# Altium PCB VG扩展板.PcbDoc
Units mil, origin at the board's own origin, x right, y up, seen from the top; angles counter-clockwise.
Board outline 6000 x 4000 mil, 2 copper layers (Top Layer, Bottom Layer); 45 components, 75 nets, 306 pads, 0 vias.
Unrouted connection lines stored in the file: 157.
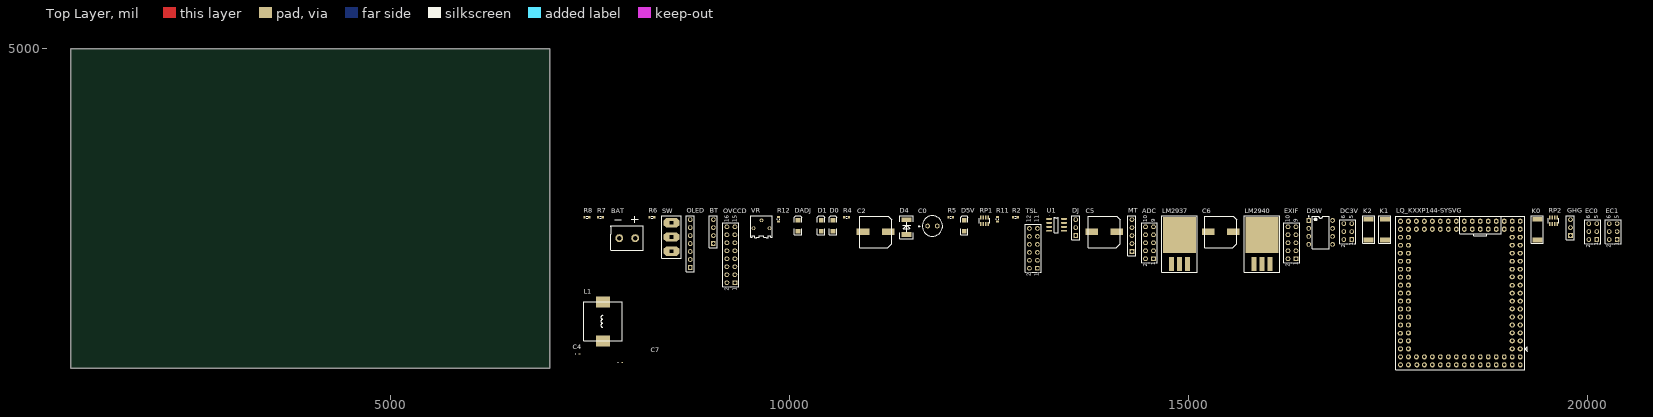
[diagram p0: Top Layer view]
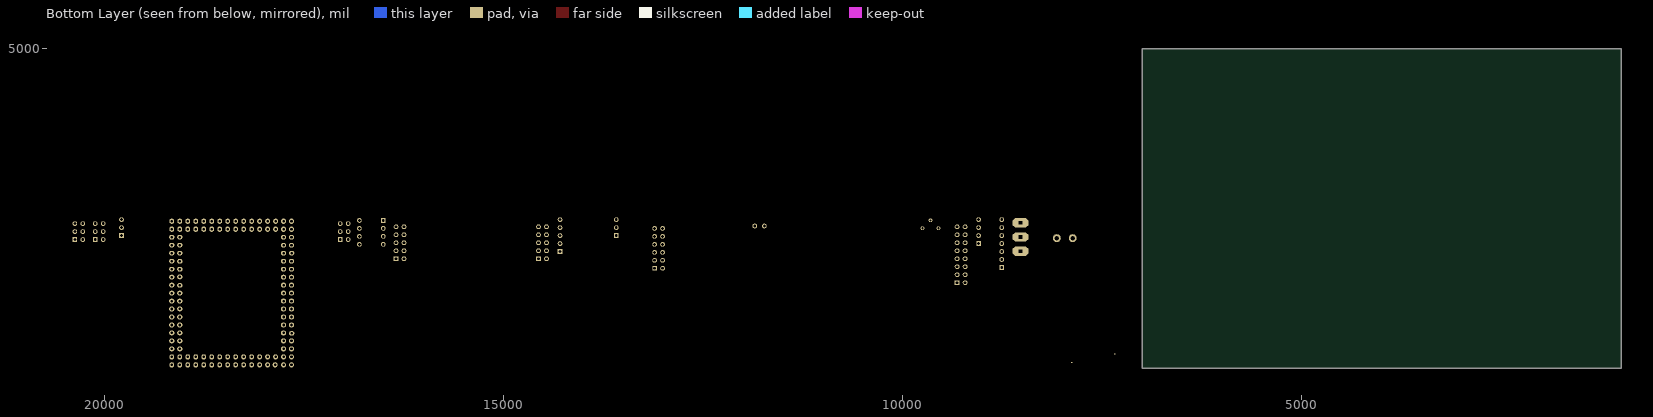
[diagram p1: Bottom Layer view, seen from below]

## Layer stack, top to bottom
Top Solder: solder mask 0.4, Solder Resist, Dk 3.5
Top Layer: signal copper 1.4
Dielectric 1: dielectric 12.6, FR-4, Dk 4.8
Bottom Layer: signal copper 1.4
Bottom Solder: solder mask 0.4, Solder Resist, Dk 3.5

## Board outline
1000,1000 7000,1000 7000,5000 1000,5000

## Design rules (kind name [scope] priority, off if disabled: settings)
Clearance [All] p1: gap=10 ignorepadtopadclearanceinfootprint=FALSE except(0: Arc-Hole Track-Hole SMDPad-Hole THPad-Hole Via-Hole Fill-Hole Poly-Hole Region-Hole Text-Hole)
PolygonConnect [All] p1: connectstyle=Relief reliefconductorwidth=10 reliefentries=4 polygonreliefangle="90 Angle" airgapwidth=10
RoutingVias [All] p1: holewidth=28 width=50 viastyle="Through Hole" minholewidth=28 minwidth=50 maxholewidth=28 maxwidth=50
SolderMaskExpansion [All] p1: expansion=4
Width [All] p1: maxlimit=10 minlimit=10 preferedwidth=10
30 further rules are at their usual default settings.

## Components (designator, comment, footprint, x,y, rotation, side; value= is the part's Value field where it differs from the comment)
ADC "AD/电磁传感器接口电路" HDR2X5 14566.22,2370 r90 top
BAT "Header 2" power1 7976.22,2630 r0 top
BT "蓝牙接口" HDR1X4 9051.22,2560 r90 top
C0 "" "rb -5" 11796.22,2780 r0 top value=220U
C2 "" 3527 11111.22,2700 r0 top value=470u
C4 "104" 0603 7360,1175 r0 top value=100nF
C5 "" 3527 13976.22,2700 r0 top value=470u
C6 "" 3527 15436.22,2700 r0 top value=470u
C7 "104" 0603 7896.22,1070 r0 top value=100nF
D0 "" 3.2X1.6X1.1 10551.22,2785 r90 top
D1 "" 3.2X1.6X1.1 10401.22,2785 r90 top
D4 "1N5824" 1812_DIODE 11471.22,2765 r90 top
D5V "" 3.2X1.6X1.1 12196.22,2785 r90 top
DADJ "" 3.2X1.6X1.1 10111.22,2785 r90 top
DC3V "3.3V扩展电路" HDR2X3 17051.22,2610 r90 top
DJ "DJ" HDR1X3 13591.22,2660 r90 top
DSW "4位薄码开关电路" DIP-8 16661.22,2700 r0 top
EC0 "" HDR2X3 20121.22,2610 r90 top
EC1 "Header 3X2" HDR2X3 20376.22,2610 r90 top
EXIF "GPIO扩展电路" HDR2X5 16351.22,2370 r90 top
GHG "" HDR1X3 19791.22,2660 r90 top
K0 "" 2512R 19376.22,2735 r90 top
K1 "" 2512R 17466.22,2735 r90 top
K2 "" 2512R 17261.22,2735 r90 top
L1 "" CL1010 7666.22,1585 r90 top value=33uH
LM2937 "3.3V稳压电路" TO263-3 14891.22,2485 r0 top
LM2940 "5V稳压电路" TO263-3 15926.22,2485 r0 top
LQ_KXXP144-SYSVG "LQ_KXXP144-SYSVG" LQ_KXXP144-SYSVG 19161.22,1240 r90 top
MT "双马达驱动" HDR1X5 14296.22,2460 r90 top
OLED "OLED接口" HDR1X7 8761.22,2260 r90 top
OVCCD "OV7620摄像头接口" HDR2X8 9321.22,2070 r90 top
R2 "" J1-0603 12836.22,2890 r0 top value=1K
R4 "" J1-0603 10721.22,2890 r0 top value=2K
R5 "" J1-0603 12026.22,2890 r0 top value=3.3K
R6 "" J1-0603 8281.22,2890 r0 top value=2K
R7 "" J1-0603 7636.22,2890 r0 top value=1K
R8 "" J1-0603 7466.22,2890 r0 top value=2K
R11 "" J1-0603 12611.22,2865 r90 top value=2K
R12 "" J1-0603 9866.22,2865 r90 top value=750R
RP1 "1K" RESPACK4_SMD 12401.22,2805 r0 top
RP2 "1K" RESPACK4_SMD 19531.22,2805 r0 top
SW "" "钮子开关 - duplicate" 8526.22,2820 r0 top
TSL "线阵CCD TSL1401接口" HDR2X6 13111.22,2250 r90 top
U1 "AS1015" SOP8L 13351.22,2795 r0 top
VR "" 3362 9521.22,2910 r0 top value=2K

## Footprints (in the part's own frame and the unit in brackets; to place one, negate y for a bottom-side part, rotate by r counter-clockwise, add the part's x,y. Pads: shape width x height; smd on the part's side, far side on the other; paste and mask are expansions set on the pad)
3.2X1.6X1.1 [mm] "SMT LED; 2 Flat Leads"
  rect 1.5x1.5 smd: 1(-1.75,0) 2(1.75,0)
  silkscreen extent -2.9,-1.15 3.2,1.15
0603 [mm]
  rect 0.5x0.3 smd far side: 1(-0.35,0)
  rect 0.5x0.3 smd: 2(0.35,0)
  silkscreen extent -0.9,-0.05 -0.9,0.05, body extent -0.33,-0.18 0.33,0.18, height 0.55
1812_DIODE [mil]
  rect 60x125 smd: 1(-92.5,0) 2(92.5,0)
  silkscreen extent -142,-85 142,85
2512R [mm]
  rect 1.52x3.2 smd: 1(-3.3,0) 2(3.3,0)
  silkscreen extent -4.4,-1.9 4.4,1.9
3362 [mm]
  round 1.2 hole 0.7: 1(0.85,-4) 2(5.95,-4) 3(3.4,-1.5)
  silkscreen extent 0,-7.1 6.8,0
3527 [mil]
  rect 160x80 smd: 1(130,10) 2(-185,10)
  silkscreen extent -225,-190 175,205
CL1010 [mil]
  rect 137.8x177.17 smd: 1(-243,-2) 2(243,-2)
  silkscreen extent -242,-242 243,242
DIP-8 [mm] "DIP; 8 Leads; Row Spacing 7.62 mm; Pitch 2.54 mm"
  rect 1.5x1.5 hole 0.9: 1(-3.81,3.81)
  round 1.5 hole 0.9: 2(-3.81,1.27) 3(-3.81,-1.27) 4(-3.81,-3.81) 5(3.81,-3.81) 6(3.81,-1.27) 7(3.81,1.27) 8(3.81,3.81)
  silkscreen extent -3.93,-5.15 2.65,5.23, body extent -3.6,-5.15 3.6,5.15, height 5.08
HDR1X3 [mm] "Connector; Header; 3 Position"
  rect 1.5x1.5 hole 0.9: 1(0,0)
  round 1.5 hole 0.9: 2(2.54,0) 3(5.08,0)
  silkscreen extent -1.27,-1.27 6.35,1.27
HDR1X4 [mm] "Connector; Header; 4 Position"
  rect 1.5x1.5 hole 0.9: 1(0,0)
  round 1.5 hole 0.9: 2(2.54,0) 3(5.08,0) 4(7.62,0)
  silkscreen extent -1.27,-1.27 8.89,1.27
HDR1X5 [mm] "Connector; Header; 5 Position"
  rect 1.5x1.5 hole 0.9: 1(0,0)
  round 1.5 hole 0.9: 2(2.54,0) 3(5.08,0) 4(7.62,0) 5(10.16,0)
  silkscreen extent -1.27,-1.27 11.43,1.27
HDR1X7 [mm] "Connector; Header; 7 Position"
  rect 1.5x1.5 hole 0.9: 1(0,0)
  round 1.5 hole 0.9: 2(2.54,0) 3(5.08,0) 4(7.62,0) 5(10.16,0) 6(12.7,0) 7(15.24,0)
  silkscreen extent -1.27,-1.27 16.51,1.27
HDR2X3 [mm] "Connector; Header; 3x2 Position"
  rect 1.5x1.5 hole 0.9: 1(0,0)
  round 1.5 hole 0.9: 2(0,2.54) 3(2.54,0) 4(2.54,2.54) 5(5.08,0) 6(5.08,2.54)
  silkscreen extent -1.27,-1.27 6.35,3.81
HDR2X5 [mm] "Connector; Header; 5x2 Position"
  rect 1.5x1.5 hole 0.9: 1(0,0)
  round 1.5 hole 0.9: 2(0,2.54) 3(2.54,0) 4(2.54,2.54) 5(5.08,0) 6(5.08,2.54) 7(7.62,0) 8(7.62,2.54) 9(10.16,0) 10(10.16,2.54)
  silkscreen extent -1.27,-1.27 11.43,3.81
HDR2X6 [mm] "Connector; Header; 6x2 Position"
  rect 1.5x1.5 hole 0.9: 1(0,0)
  round 1.5 hole 0.9: 2(0,2.54) 3(2.54,0) 4(2.54,2.54) 5(5.08,0) 6(5.08,2.54) 7(7.62,0) 8(7.62,2.54) 9(10.16,0) 10(10.16,2.54) 11(12.7,0) 12(12.7,2.54)
  silkscreen extent -1.27,-1.27 13.97,3.81
HDR2X8 [mm] "Connector; Header; 8x2 Position"
  rect 1.5x1.5 hole 0.9: 1(0,0)
  round 1.5 hole 0.9: 2(0,2.54) 3(2.54,0) 4(2.54,2.54) 5(5.08,0) 6(5.08,2.54) 7(7.62,0) 8(7.62,2.54) 9(10.16,0) 10(10.16,2.54) 11(12.7,0) 12(12.7,2.54) 13(15.24,0) 14(15.24,2.54) 15(17.78,0) 16(17.78,2.54)
  silkscreen extent -1.27,-1.27 19.05,3.81
J1-0603 [mm] "Chip Resistor, Body 1.6x0.8mm, IPC High Density"
  rect 0.7x0.9 smd: 1(-0.75,0) 2(0.75,0)
  silkscreen extent -0.2,-0.35 0.2,0.35, body extent -0.85,-0.48 0.85,0.48, height 0.9
LQ_KXXP144-SYSVG [mil]
  oval 59x66 hole 32: 1(0,0) 2(0,100) 3(100,0) 4(100,100) 5(200,0) 6(200,100) 7(300,0) 8(300,100) 9(400,0) 10(400,100) 11(500,0) 12(500.79,100) 13(600,0) 14(600,100) 15(700,0) 16(700,100) 17(800,0) 18(796.85,100) 19(900,0) 20(902.36,100) 21(1000,0) 22(998.82,100) 23(1100,0) 24(1097.64,100) 25(1200,0) 26(1200.39,100) 27(1300,0) 28(1300,100) 29(1400,0) 30(1400.39,100) 63(1400,1500) 64(1400,1400) 65(1300,1500) 66(1300,1400) 67(1200,1501.97) 68(1200,1400) 69(1100,1500) 70(1100,1400) 71(1000,1500) 72(1000,1400) 73(900,1500) 74(900,1400) 75(800,1500) 76(800,1400) 77(700,1500) 78(700,1400) 79(600,1500) 80(600,1400) 81(500,1500) 82(500,1400) 83(400,1500) 84(400,1400) 85(300,1500) 86(300,1400) 87(194.88,1502.36) 88(200,1400) 89(100,1500) 90(100,1400) 91(0,1500) 92(0,1400)
  oval 66x59 hole 32: 31(1500,0) 32(1600,0) 33(1500,100) 34(1600,100) 35(1500,200) 36(1600,200) 37(1500,300) 38(1600,300) 39(1500,400.79) 40(1600,400) 41(1500,500) 42(1600,500.39) 43(1500,600) 44(1600,600) 45(1500,700) 46(1600,700) 47(1500,800) 48(1600,800) 49(1500,900) 50(1600,900) 51(1500,1000) 52(1600,1000) 53(1500,1100) 54(1600,1100) 55(1500,1200) 56(1600,1200) 57(1500,1300) 58(1600,1300) 59(1500,1400) 60(1600,1400) 61(1500,1500) 62(1600,1500) 93(-100,1500) 94(-200,1500) 95(-100,1400) 96(-200,1400) 97(-100,1300) 98(-200,1294.09) 99(-100,1200) 100(-200,1200) 101(-100,1100) 102(-200,1100) 103(-100,1000) 104(-200,1000) 105(-100,899.61) 106(-200,900.39) 107(-100,800) 108(-200,800) 109(-100,700) 110(-200,700) 111(-100,600) 112(-200,600) 113(-100,500) 114(-200,500) 115(-100,400) 116(-200,400) 117(-100,300) 118(-200,300) 119(-100,200) 120(-200,200) 121(-100,100) 122(-200,100) 123(-100,0) 124(-200,0)
  silkscreen extent -260,-87 1660,1560
power1 [mm]
  round 2.5 hole 1.5: 1(-2.642,-0.051) 2(2.413,-0.051)
  silkscreen extent -5.38,-3.96 5.05,6.98
"rb -5" [mm]
  round 1.5 hole 0.9: 1(-1.524,0) 2(1.524,0)
  silkscreen extent -4.57,-3.25 3.25,3.25
RESPACK4_SMD [mm]
  rect 0.4x1.174 smd: 1(0,0) 2(0,2.074) 3(0.8,0) 4(0.8,2.074) 5(1.6,0) 6(1.6,2.074) 7(2.4,0) 8(2.4,2.074)
  silkscreen extent -0.45,0.21 2.85,1.86
SOP8L [mm]
  oval 1.9x0.6 smd: 1(-2.35,1.905) 2(-2.35,0.635) 3(-2.35,-0.635) 4(-2.35,-1.905) 5(2.35,-1.905) 6(2.35,-0.635) 7(2.35,0.635) 8(2.35,1.905)
  silkscreen extent -2.38,-2.57 0.62,2.91, body extent -2.99,-2.49 3.05,2.53, height 1.7
TO263-3 [mm]
  rect 1.5x4.5 smd: 1(-2.54,-4.648) 2(0,-4.648) 3(2.54,-4.648)
  rect 10.5x11.5 smd: 4(0,4.648)
  silkscreen extent -5.6,-7.25 5.6,10.75
"钮子开关 - duplicate" [mm]
  oct 5x3 hole 1 square: 1(0,0) 2(0,-4.5) 3(0,-9)
  silkscreen extent -3.17,-11.25 3.17,2.25

## Part data
ADC EXIF: library part "Header 5X2", "Header, 5-Pin, Dual row", LatestRevisionDate=17-Jul-2002, LatestRevisionNote="Re-released for DXP Platform.", Publisher="Altium Limited"
BAT: "Header, 2-Pin", LatestRevisionDate=17-Jul-2002, LatestRevisionNote="Re-released for DXP Platform.", Publisher="Altium Limited"
BT: library part "Header 4", "Header, 4-Pin", LatestRevisionDate=17-Jul-2002, LatestRevisionNote="Re-released for DXP Platform.", Publisher="Altium Limited"
C0: library part "Cap Pol1", "Polarized Capacitor (Radial)", LatestRevisionDate=17-Jul-2002, LatestRevisionNote="Re-released for DXP Platform.", PackageDescription="Polarized Capacitor (Radial); 2 Leads", PackageReference=RB7.6-15, Published=8-Jun-2000, Publisher="Altium Limited"
C2 C5 C6: library part "Cap Pol3", "Polarized Capacitor (Surface Mount)", LatestRevisionDate=29-May-2009, LatestRevisionNote="IPC-7351 Footprint Added.", PackageDescription="Chip Capacitor", PackageReference=C0805, Published=8-Jun-2000, Publisher="Altium Limited"
C4 C7: library part "Cap Semi", "Capacitor (Semiconductor SIM Model)", LatestRevisionDate=29-May-2009, LatestRevisionNote="IPC-7351 Footprint Added.", PackageDescription="Chip Capacitor", PackageReference=C1206, Published=8-Jun-2000, Publisher="Altium Limited"
D0 D1 D5V DADJ: library part LED3, "Typical BLUE SiC LED", DatasheetVersion=16-Apr-2002, LatestRevisionDate=17-Dec-2003, LatestRevisionNote="PCB Footprint replaced.", PackageDescription="SM LED; 2 C-Bend Leads; Body 3.5 x 2.8 x 1.9 mm, inc leads (LxWxH typ)", PackageReference=3.5X2.8X1.9, PackageVersion=16-Apr-2002, Published=8-Jun-2000, Publisher="Altium Limited"
D4: library part Diode, "Default Diode", Code_JEDEC=DO-214-AB, LatestRevisionDate=17-Jul-2002, LatestRevisionNote="Re-released for DXP Platform.", PackageDescription="DO-214-AB/SMC; 2 C-Bend Leads; Body 7.9 x 5.9 mm, inc. leads (LxW)", PackageReference=SMC, PackageVersion=Sep-1996, Published=8-Jun-2000, Publisher="Altium Limited"
DC3V: library part "Header 3X2H", "Header, 3-Pin, Dual row, Right Angle", LatestRevisionDate=17-Jul-2002, LatestRevisionNote="Re-released for DXP Platform.", Publisher="Altium Limited"
DJ GHG: library part "Header 3", "Header, 3-Pin", LatestRevisionDate=17-Jul-2002, LatestRevisionNote="Re-released for DXP Platform.", Publisher="Altium Limited"
DSW: library part SW-DIP4, "DIP Switch", LatestRevisionDate=17-Jul-2002, LatestRevisionNote="Re-released for DXP Platform.", PackageReference=DIP-8, Published=24-Mar-1999, Publisher="Altium Limited"
EC0: library part "Header 3X2", "Header, 3-Pin, Dual row", LatestRevisionDate=17-Jul-2002, LatestRevisionNote="Re-released for DXP Platform.", Publisher="Altium Limited"
EC1: "Header, 3-Pin, Dual row", LatestRevisionDate=17-Jul-2002, LatestRevisionNote="Re-released for DXP Platform.", Publisher="Altium Limited"
K0 K1 K2: library part SW-PB, "Switch", LatestRevisionDate=17-Jul-2002, LatestRevisionNote="Re-released for DXP Platform.", PackageDescription="Switch; 2 Leads", PackageReference=SPST-2, Published=24-Mar-1999, Publisher="Altium Limited"
L1: library part Inductor, "Inductor", Code_IEC=1005, Code_JEITA=0402, LatestRevisionDate=29-May-2009, LatestRevisionNote="IPC-7351 Footprint Added.", PackageDescription="Chip Inductor", PackageReference=0402-A, Published=8-Jun-2000, Publisher="Altium Limited"
LM2937 LM2940: library part LM2940, "固定5V输出直流稳压芯片"
MT: library part "Header 5", "Header, 5-Pin", LatestRevisionDate=17-Jul-2002, LatestRevisionNote="Re-released for DXP Platform.", Publisher="Altium Limited"
OLED: library part "Header 7", "Header, 7-Pin", LatestRevisionDate=17-Jul-2002, LatestRevisionNote="Re-released for DXP Platform.", Publisher="Altium Limited"
OVCCD: library part "Header 8X2", "Header, 8-Pin, Dual row", LatestRevisionDate=17-Jul-2002, LatestRevisionNote="Re-released for DXP Platform.", Publisher="Altium Limited"
R2 R4 R5 R6 R7 R8 R11 R12: library part Res3, "Resistor", LatestRevisionDate=29-May-2009, LatestRevisionNote="IPC-7351 Footprint Added.", PackageDescription="Chip Resistor", PackageReference=J1-0603, Published=8-Jun-2000, Publisher="Altium Limited"
RP1 RP2: library part RESPACK4
SW: library part 钮子开关
TSL: library part "Header 6X2", "Header, 6-Pin, Dual row", LatestRevisionDate=17-Jul-2002, LatestRevisionNote="Re-released for DXP Platform.", Publisher="Altium Limited"
VR: library part "Res Tap", "Tapped Resistor", LatestRevisionDate=17-Jul-2002, LatestRevisionNote="Re-released for DXP Platform.", PackageDescription="Variable Resistor, Thru-Hole; 3 Leads", PackageReference=VR3, Published=24-Mar-1999, Publisher="Altium Limited", Set Position=0.5, Sim Note="Enter the Resistance value and the set point into parameter fields."

## Nets (pads, with @x,y where several pads share a name; then routed paths per layer and width w, separated by ;. In a path a pad name is that pad's centre, name@x,y a point inside that pad or via, vN(x,y) a via of type N, cw(c..) or ccw(c..) an arc to the next point about the centre after c; other vN are vias at no path point)
3.3V: BT.1 C4.2 C5.1 D0.1 D1.1 DC3V.1 DC3V.3 DC3V.5 GHG.1 LM2937.3 LQ_KXXP144-SYSVG.45 MT.5 OLED.2 RP2.2 RP2.4 RP2.6 RP2.8
5V: ADC.9 C6.1 C7.2 D5V.1 EC0.2 EC1.2 EXIF.2 EXIF.4 LM2940.3 OVCCD.15 TSL.3 TSL.4
AD0: ADC.7 LQ_KXXP144-SYSVG.70
AD1: ADC.8 LQ_KXXP144-SYSVG.69
AD2: ADC.5 LQ_KXXP144-SYSVG.72
AD3: ADC.6 LQ_KXXP144-SYSVG.71
AD4: ADC.3 LQ_KXXP144-SYSVG.80
AD5: ADC.4 LQ_KXXP144-SYSVG.79
AD6: ADC.1 LQ_KXXP144-SYSVG.26 TSL.11
AD7: ADC.2 LQ_KXXP144-SYSVG.27 TSL.12
AD8: LQ_KXXP144-SYSVG.51 R8.2
AD9: LQ_KXXP144-SYSVG.20 TSL.5
AD10: LQ_KXXP144-SYSVG.18 TSL.6
BAT: C0.1 LM2937.1 LM2940.1 R4.1 R6.2 R11.2 SW.2 U1.4
CTL: R4.2 U1.2
GND: ADC.10 BAT.1 BT.2 C0.2 C2.2 C4.1 C5.2 C6.2 C7.1 D4.1 DADJ.2 DC3V.2 DC3V.4 DC3V.6 DJ.1 DSW.1 DSW.2 DSW.3 DSW.4 EC0.1 EC1.1 EXIF.1 EXIF.3 GHG.2 K0.1 K1.1 K2.1 LM2937.2 LM2940.2 LQ_KXXP144-SYSVG.41 LQ_KXXP144-SYSVG.43 OLED.1 OVCCD.13 OVCCD.16 R7.1 RP1.2 TSL.1 TSL.2 U1.7 U1.8 VR.2
HRF: LQ_KXXP144-SYSVG.96 OVCCD.12
NetC2_1: C2.1 DJ.2 L1.2 R2.2 R5.2
NetD0_2: D0.2 RP1.5
NetD1_2: D1.2 RP1.7
NetD4_2: D4.2 L1.1 U1.5 U1.6
NetD5V_2: D5V.2 RP1.1
NetDADJ_1: DADJ.1 R5.1
NetR2_1: R2.1 U1.1 VR.3
NetR6_1: R6.1 R7.2 R8.1
NetR11_1: R11.1 R12.2
NetR12_1: R12.1 U1.3
PCLK: LQ_KXXP144-SYSVG.62 OVCCD.11
PTA12: EC0.3 LQ_KXXP144-SYSVG.55
PTA13: EC0.4 LQ_KXXP144-SYSVG.56
PTA16: GHG.3 LQ_KXXP144-SYSVG.59
PTB16: EC1.3 LQ_KXXP144-SYSVG.82
PTB17: EC1.4 LQ_KXXP144-SYSVG.81
PTB19: DJ.3 LQ_KXXP144-SYSVG.83
PTB20: K0.2 LQ_KXXP144-SYSVG.86 RP2.1
PTB21: K1.2 LQ_KXXP144-SYSVG.85 RP2.3
PTB22: K2.2 LQ_KXXP144-SYSVG.88 RP2.7
PTC1: LQ_KXXP144-SYSVG.89 MT.4
PTC2: LQ_KXXP144-SYSVG.92 MT.3
PTC3: LQ_KXXP144-SYSVG.91 MT.2
PTC4: LQ_KXXP144-SYSVG.94 MT.1
PTC7: LQ_KXXP144-SYSVG.95 OVCCD.14
PTC8: DSW.8 LQ_KXXP144-SYSVG.98
PTC9: DSW.7 LQ_KXXP144-SYSVG.97
PTC10: DSW.6 LQ_KXXP144-SYSVG.100
PTC11: DSW.5 LQ_KXXP144-SYSVG.99
PTC13: LQ_KXXP144-SYSVG.101 OLED.6
PTC14: LQ_KXXP144-SYSVG.104 OLED.5
PTC15: LQ_KXXP144-SYSVG.103 OLED.4
PTC16: LQ_KXXP144-SYSVG.106 OLED.3
PTC18: LQ_KXXP144-SYSVG.108 RP1.6
PTC19: LQ_KXXP144-SYSVG.107 RP1.8
PTD0: LQ_KXXP144-SYSVG.110 OVCCD.1
PTD1: LQ_KXXP144-SYSVG.109 OVCCD.2
PTD2: LQ_KXXP144-SYSVG.112 OVCCD.3
PTD3: LQ_KXXP144-SYSVG.111 OVCCD.4
PTD4: LQ_KXXP144-SYSVG.114 OVCCD.5
PTD5: LQ_KXXP144-SYSVG.113 OVCCD.6
PTD6: LQ_KXXP144-SYSVG.116 OVCCD.7
PTD7: LQ_KXXP144-SYSVG.115 OVCCD.8
PTE0: LQ_KXXP144-SYSVG.1 OVCCD.9
PTE1: LQ_KXXP144-SYSVG.2 OVCCD.10
PTE2: LQ_KXXP144-SYSVG.3 TSL.8
PTE3: LQ_KXXP144-SYSVG.4 TSL.10
PTE4: LQ_KXXP144-SYSVG.5 TSL.7
PTE5: LQ_KXXP144-SYSVG.6 TSL.9
PTE7: EXIF.5 LQ_KXXP144-SYSVG.8
PTE8: EXIF.6 LQ_KXXP144-SYSVG.9
PTE9: EXIF.7 LQ_KXXP144-SYSVG.10
PTE10: EXIF.8 LQ_KXXP144-SYSVG.11
PTE11: EXIF.9 LQ_KXXP144-SYSVG.12
PTE12: EXIF.10 LQ_KXXP144-SYSVG.13
PTE24: BT.4 LQ_KXXP144-SYSVG.32
PTE25: BT.3 LQ_KXXP144-SYSVG.33
VCC12V: BAT.2 SW.1
pads on no net: EC0.5 EC0.6 EC1.5 EC1.6 LM2937.4 LM2940.4 LQ_KXXP144-SYSVG.7 LQ_KXXP144-SYSVG.14 LQ_KXXP144-SYSVG.15 LQ_KXXP144-SYSVG.16 LQ_KXXP144-SYSVG.17 LQ_KXXP144-SYSVG.19 LQ_KXXP144-SYSVG.21 LQ_KXXP144-SYSVG.22 LQ_KXXP144-SYSVG.23 LQ_KXXP144-SYSVG.24 LQ_KXXP144-SYSVG.25 LQ_KXXP144-SYSVG.28 LQ_KXXP144-SYSVG.29 LQ_KXXP144-SYSVG.30 LQ_KXXP144-SYSVG.31 LQ_KXXP144-SYSVG.34 LQ_KXXP144-SYSVG.35 LQ_KXXP144-SYSVG.36 LQ_KXXP144-SYSVG.37 LQ_KXXP144-SYSVG.38 LQ_KXXP144-SYSVG.39 LQ_KXXP144-SYSVG.40 LQ_KXXP144-SYSVG.42 LQ_KXXP144-SYSVG.44 LQ_KXXP144-SYSVG.46 LQ_KXXP144-SYSVG.47 LQ_KXXP144-SYSVG.48 LQ_KXXP144-SYSVG.49 LQ_KXXP144-SYSVG.50 LQ_KXXP144-SYSVG.52 LQ_KXXP144-SYSVG.53 LQ_KXXP144-SYSVG.54 LQ_KXXP144-SYSVG.57 LQ_KXXP144-SYSVG.58 LQ_KXXP144-SYSVG.60 LQ_KXXP144-SYSVG.61 LQ_KXXP144-SYSVG.63 LQ_KXXP144-SYSVG.64 LQ_KXXP144-SYSVG.65 LQ_KXXP144-SYSVG.66 LQ_KXXP144-SYSVG.67 LQ_KXXP144-SYSVG.68 LQ_KXXP144-SYSVG.73 LQ_KXXP144-SYSVG.74 LQ_KXXP144-SYSVG.75 LQ_KXXP144-SYSVG.76 LQ_KXXP144-SYSVG.77 LQ_KXXP144-SYSVG.78 LQ_KXXP144-SYSVG.84 LQ_KXXP144-SYSVG.87 LQ_KXXP144-SYSVG.90 LQ_KXXP144-SYSVG.93 LQ_KXXP144-SYSVG.102 LQ_KXXP144-SYSVG.105 LQ_KXXP144-SYSVG.117 LQ_KXXP144-SYSVG.118 LQ_KXXP144-SYSVG.119 LQ_KXXP144-SYSVG.120 LQ_KXXP144-SYSVG.121 LQ_KXXP144-SYSVG.122 LQ_KXXP144-SYSVG.123 LQ_KXXP144-SYSVG.124 OLED.7 RP1.3 RP1.4 RP2.5 SW.3 VR.1

## Text inside footprints (layer, text, board x,y; h text height)
ADC: Top Overlay "2" at 14486.22,2270 h50 r90; Top Overlay "1" at 14586.22,2290 h50 r90; Top Overlay "9" at 14586.22,2830 h50 r90; Top Overlay "10" at 14486.22,2830 h50 r90
DC3V: Top Overlay "1" at 17071.22,2530 h50 r90; Top Overlay "2" at 16971.22,2510 h50 r90; Top Overlay "5" at 17071.22,2870 h50 r90; Top Overlay "6" at 16971.22,2870 h50 r90
EC0: Top Overlay "1" at 20141.22,2530 h50 r90; Top Overlay "2" at 20041.22,2510 h50 r90; Top Overlay "5" at 20141.22,2870 h50 r90; Top Overlay "6" at 20041.22,2870 h50 r90
EC1: Top Overlay "1" at 20396.22,2530 h50 r90; Top Overlay "2" at 20296.22,2510 h50 r90; Top Overlay "5" at 20396.22,2870 h50 r90; Top Overlay "6" at 20296.22,2870 h50 r90
EXIF: Top Overlay "2" at 16271.22,2270 h50 r90; Top Overlay "1" at 16371.22,2290 h50 r90; Top Overlay "9" at 16371.22,2830 h50 r90; Top Overlay "10" at 16271.22,2830 h50 r90
OVCCD: Top Overlay "16" at 9241.22,2830 h50 r90; Top Overlay "15" at 9341.22,2830 h50 r90; Top Overlay "1" at 9341.22,1970 h50 r90; Top Overlay "2" at 9241.22,1970 h50 r90
TSL: Top Overlay "2" at 13031.22,2150 h50 r90; Top Overlay "1" at 13131.22,2150 h50 r90; Top Overlay "1" at 13131.22,2830 h50 r90; Top Overlay "1" at 13131.22,2870 h50 r90; Top Overlay "12" at 13031.22,2830 h50 r90